# Altium PCB LDO_board.PcbDoc
Units mm, origin at the board's own origin, x right, y up, seen from the top; angles counter-clockwise.
Board outline 37 x 49 mm, 2 copper layers (Top Layer, Bottom Layer); 25 components, 14 nets, 135 pads, 56 vias.
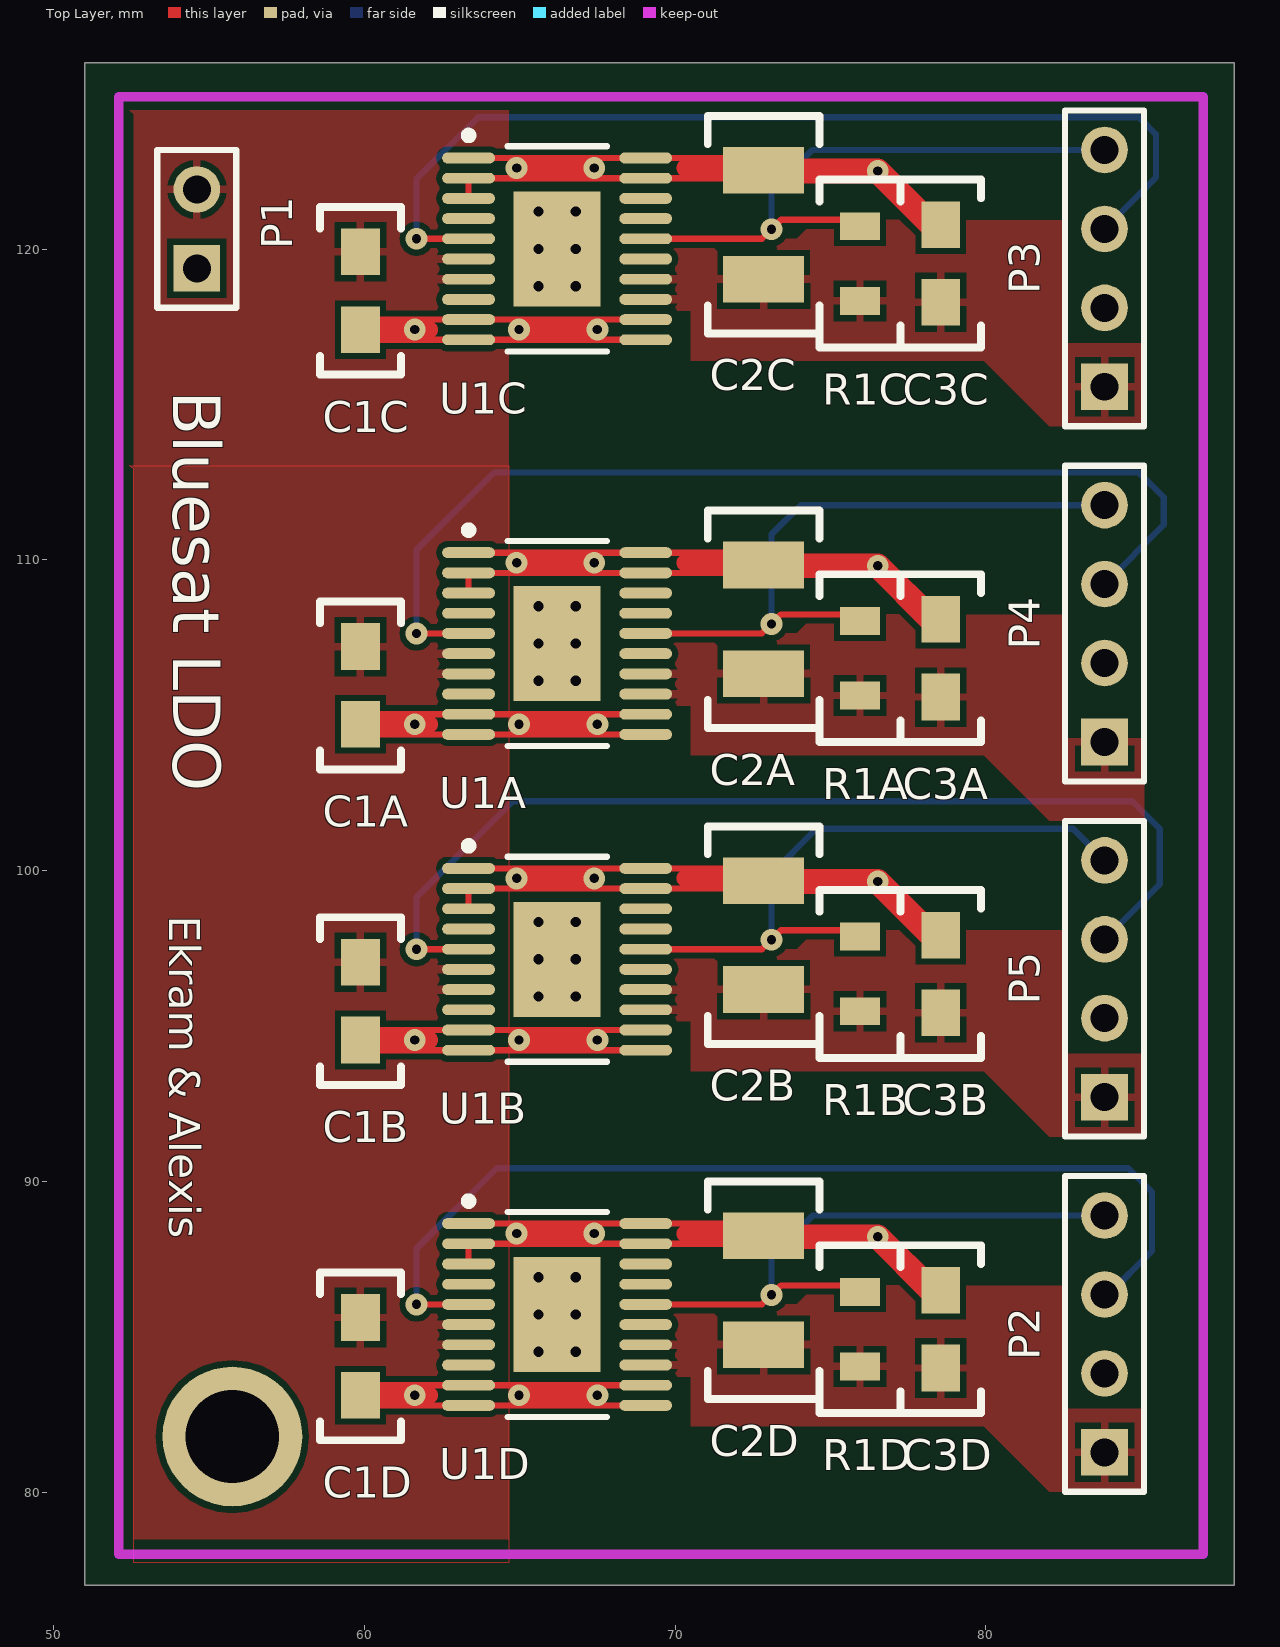
[diagram p0: Top Layer view]
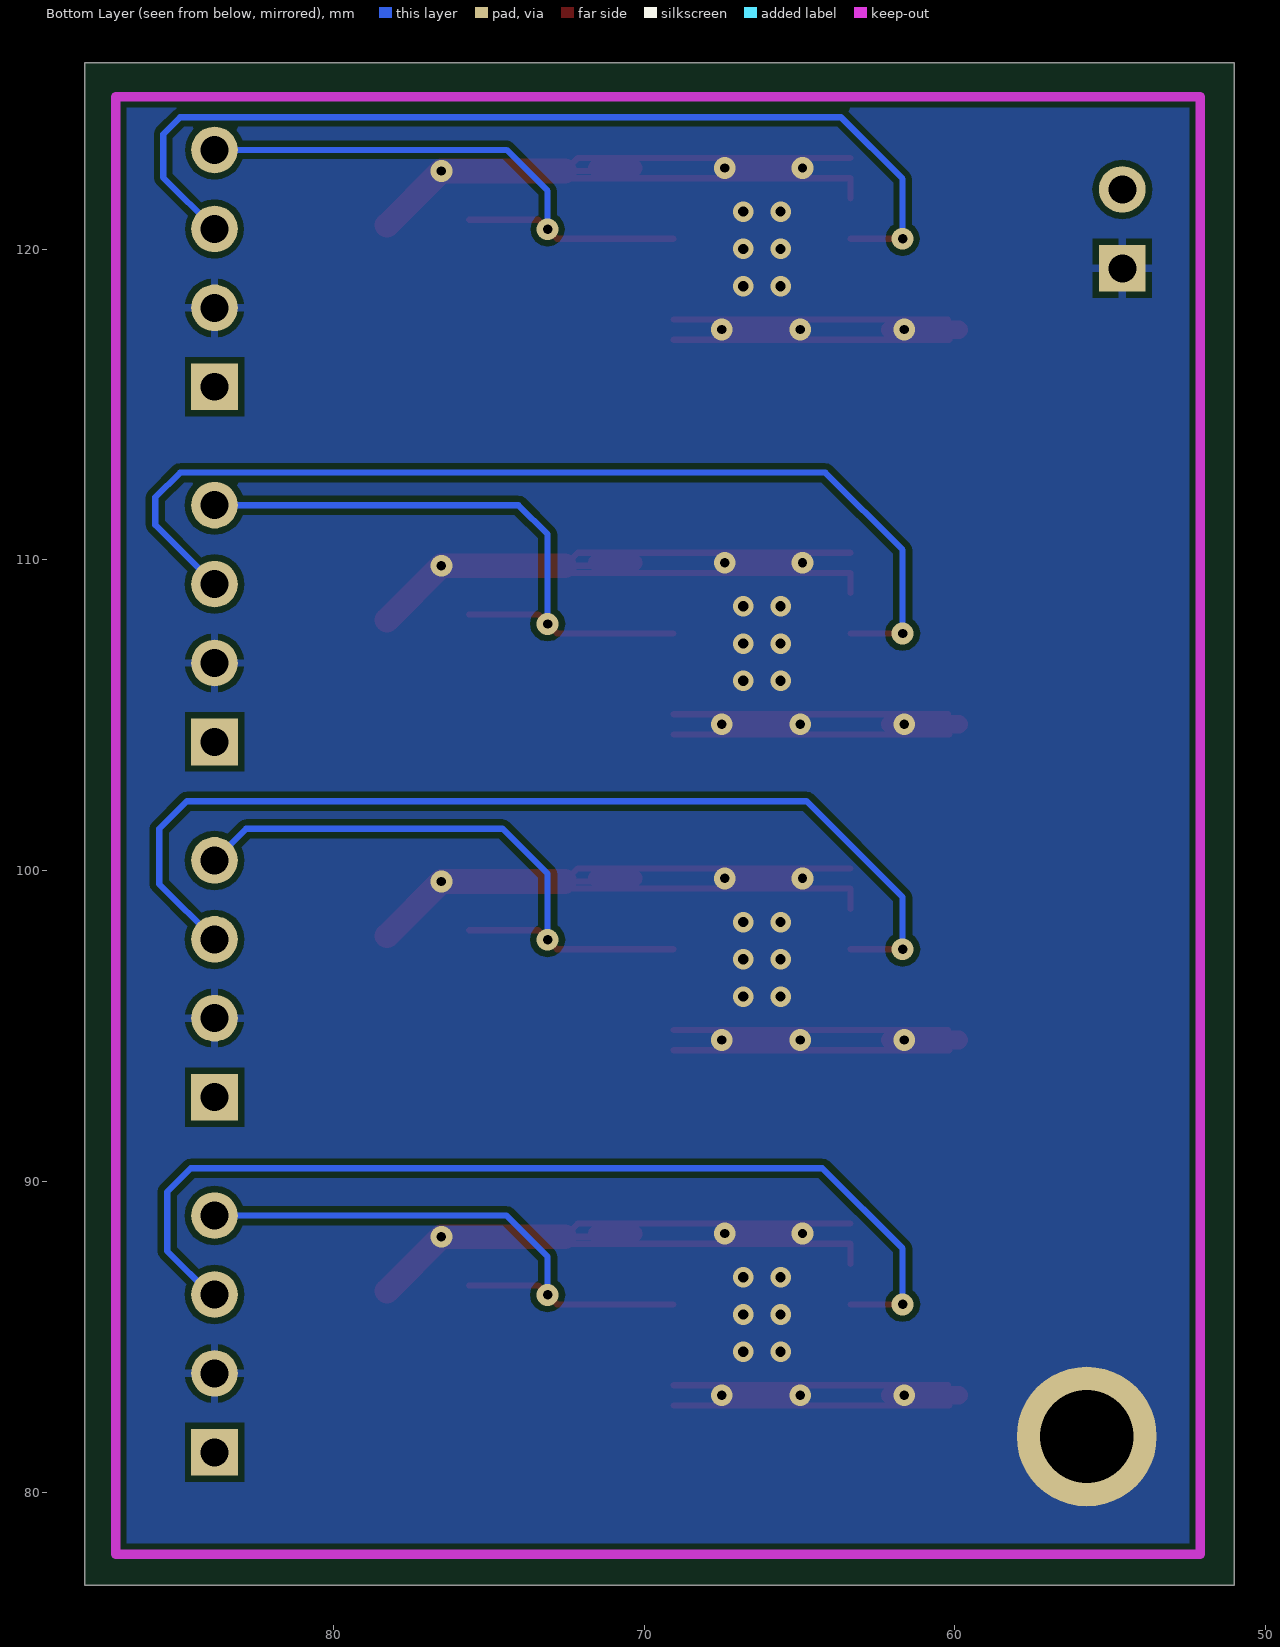
[diagram p1: Bottom Layer view, seen from below]

## Layer stack, top to bottom
Top Layer: signal copper 0.0356
Dielectric: dielectric 0.32, FR-4, Dk 4.8
Bottom Layer: signal copper 0.0356

## Board outline
52,77 88,77 88,126 51,126 51,77

## Design rules (kind name [scope] priority, off if disabled: settings)
Clearance [All] p1: gap=0.2
PlaneConnect PlaneConnect_1 [OnLayer('Bottom Layer')] p1: planeconnectstyle=Direct reliefexpansion=0.508 reliefentries=4 reliefconductorwidth=0.254 reliefairgap=0.254
PlaneConnect [All] p2: planeconnectstyle=Relief reliefexpansion=0.508 reliefentries=4 reliefconductorwidth=0.254 reliefairgap=0.254
PolygonConnect PolygonConnect_2 [All vs (InPadClass('All Pads'))] p1: connectstyle=Relief reliefconductorwidth=0.254 reliefentries=4 polygonreliefangle="90 Angle"
PolygonConnect PolygonConnect_1 [All vs InNet('GND')] p2: connectstyle=Direct reliefconductorwidth=0.254 reliefentries=4 polygonreliefangle="90 Angle"
PolygonConnect [All] p3: connectstyle=Relief reliefconductorwidth=0.254 reliefentries=4 polygonreliefangle="90 Angle"
RoomDefinition LDO13 [InComponentClass('LDO13')] p1: confinementstyle=ConfineIn formatcopy=TRUE lockcomponents=FALSE outline 58.375,115.76 82.55,115.76 82.55,124.46 58.375,124.46
RoomDefinition LDO14 [InComponentClass('LDO14')] p2: confinementstyle=ConfineIn formatcopy=TRUE lockcomponents=FALSE outline 58.375,81.47 82.55,81.47 82.55,90.17 58.375,90.17
RoomDefinition LDO12 [InComponentClass('LDO12')] p3: confinementstyle=ConfineIn formatcopy=TRUE lockcomponents=FALSE outline 58.375,92.9 82.55,92.9 82.55,101.6 58.375,101.6
RoomDefinition LDO11 [InComponentClass('LDO11')] p4: confinementstyle=ConfineIn formatcopy=TRUE lockcomponents=FALSE outline 58.375,103.06 82.55,103.06 82.55,111.76 58.375,111.76
RoutingVias [All] p1: holewidth=0.3 width=0.7 viastyle="Through Hole" minholewidth=0.711 minwidth=1.27 maxholewidth=0.711 maxwidth=1.27
SilkscreenOverComponentPads [All] p1: minsilkscreentomaskgap=0.254
SolderMaskExpansion [All] p1: expansion=0.102
Width [All] p1: maxlimit=1 minlimit=0.2 preferedwidth=0.2
26 further rules are at their usual default settings.

## Classes and differential pairs
component class LDO11: C1A C2A C3A R1A U1A
component class LDO12: C1B C2B C3B R1B U1B
component class LDO13: C1C C2C C3C R1C U1C
component class LDO14: C1D C2D C3D R1D U1D
component class LDO-Board: P1 P2 P3 P4 P5
channel class LDO-BASE: LDO11 LDO12 LDO13 LDO14

## Components (designator, comment, footprint, x,y, rotation, side; value= is the part's Value field where it differs from the comment)
C1A "0805 Cap" "0805 Cap" 59.875,105.96 r270 top (schematic designator C1)
C1B "0805 Cap" "0805 Cap" 59.875,95.8 r270 top (schematic designator C1)
C1C "0805 Cap" "0805 Cap" 59.875,118.66 r270 top (schematic designator C1)
C1D "0805 Cap" "0805 Cap" 59.875,84.37 r270 top (schematic designator C1)
C2A "1210 Cap" "1210 Cap" 72.85,108.085 r90 top (schematic designator C2)
C2B "1210 Cap" "1210 Cap" 72.85,97.925 r90 top (schematic designator C2)
C2C "1210 Cap" "1210 Cap" 72.85,120.785 r90 top (schematic designator C2)
C2D "1210 Cap" "1210 Cap" 72.85,86.495 r90 top (schematic designator C2)
C3A "0805 Cap" "0805 Cap" 78.55,106.835 r90 top (schematic designator C3)
C3B "0805 Cap" "0805 Cap" 78.55,96.675 r90 top (schematic designator C3)
C3C "0805 Cap" "0805 Cap" 78.55,119.535 r90 top (schematic designator C3)
C3D "0805 Cap" "0805 Cap" 78.55,85.245 r90 top (schematic designator C3)
P1 "Header 2" HDR1X2 54.61,119.38 r90 top
P2 "Header 1" HDR1X4 83.82,81.28 r90 top
P3 "Header 2" HDR1X4 83.82,115.57 r90 top
P4 "Header 3" HDR1X4 83.82,104.14 r90 top
P5 "Header 4" HDR1X4 83.82,92.71 r90 top
R1A "0805 Resistor" "0805 Resistor" 75.95,106.835 r270 top (schematic designator R1)
R1B "0805 Resistor" "0805 Resistor" 75.95,96.675 r270 top (schematic designator R1)
R1C "0805 Resistor" "0805 Resistor" 75.95,119.535 r270 top (schematic designator R1)
R1D "0805 Resistor" "0805 Resistor" 75.95,85.245 r270 top (schematic designator R1)
U1A "TPS76700" "SOP-20 TPS76700" 66.205,107.306 r0 top (schematic designator U1)
U1B "TPS76700" "SOP-20 TPS76700" 66.205,97.146 r0 top (schematic designator U1)
U1C "TPS76700" "SOP-20 TPS76700" 66.205,120.006 r0 top (schematic designator U1)
U1D "TPS76700" "SOP-20 TPS76700" 66.205,85.716 r0 top (schematic designator U1)

## Footprints (in the part's own frame and the unit in brackets; to place one, negate y for a bottom-side part, rotate by r counter-clockwise, add the part's x,y. Pads: shape width x height; smd on the part's side, far side on the other; paste and mask are expansions set on the pad)
"0805 Cap" [mm] "0805 Capacitor"
  rect 1.5x1.25 smd: 1(1.25,0) 2(-1.25,0)
  silkscreen extent -2.7,-1.3 2.7,1.3, body extent -1,-0.63 1.1,0.63, height 0.9
"0805 Resistor" [mm] "0805 Resistor"
  rect 0.9x1.3 smd: 1(1.2,0) 2(-1.2,0)
  silkscreen extent -2.7,-1.3 2.7,1.3, body extent -1,-0.63 1.1,0.63, height 0.6
"1210 Cap" [mm] "1210 Capacitor"
  rect 1.5x2.6 smd: 1(1.75,0) 2(-1.75,0)
  silkscreen extent -3.5,-1.8 3.5,1.8, body extent -1.6,-1.1 1.6,1.1, height 1.8
HDR1X2 [mm] "Connector; Header; 2 Position"
  rect 1.5x1.5 hole 0.9: 1(0,0)
  round 1.5 hole 0.9: 2(2.54,0)
  silkscreen extent -1.27,-1.27 3.81,1.27
HDR1X4 [mm] "Connector; Header; 4 Position"
  rect 1.5x1.5 hole 0.9: 1(0,0)
  round 1.5 hole 0.9: 2(2.54,0) 3(5.08,0) 4(7.62,0)
  silkscreen extent -1.27,-1.27 8.89,1.27
"SOP-20 TPS76700" [mm] "TSOP, 20-Leads, Body 6.6x4.5mm (max), Pitch 0.65mm, IPC Medium Density"
  oval 1.7x0.35 smd: 1(-2.85,2.925) 2(-2.85,2.275) 3(-2.85,1.625) 4(-2.85,0.975) 5(-2.85,0.325) 6(-2.85,-0.325) 7(-2.85,-0.975) 8(-2.85,-1.625) 9(-2.85,-2.275) 10(-2.85,-2.925) 11(2.85,-2.925) 12(2.85,-2.275) 13(2.85,-1.625) 14(2.85,-0.975) 15(2.85,-0.325) 16(2.85,0.325) 17(2.85,0.975) 18(2.85,1.625) 19(2.85,2.275) 20(2.85,2.925)
  rect 2.8x3.7 smd: 21(0,0)
  silkscreen extent -2.97,-3.3 1.6,3.77, body extent -2.25,-3.3 2.25,3.3, height 1.2

## Part data
C1A C1B C1C C1D C3A C3B C3C C3D: library part "0805 MLCC - X7R, 10%", "0805 MLCC - X7R, 10%"
C2A C2B C2C C2D: library part "1210 MLCC - X7R, 10%", "1210 MLCC - X7R, 10%"
P1: "Header, 2-Pin"
P2 P3 P4: library part "Header 4", "Header, 4-Pin"
P5: "Header, 4-Pin"
R1A R1B R1C R1D: library part "0805 Thick Film Resistor 1%", "0805 Thick Film Resistor 1%"
U1A U1B U1C U1D: "LDO Regulator - ER"

## Free pads (board coordinates)
  round 4.5 hole 3: 0(55.753,81.788)

## Via types
v1: diameter 0.7, hole 0.3, Top Layer to Bottom Layer, tented both sides, 32 vias
v2: diameter 0.66, hole 0.33, Top Layer to Bottom Layer, tented both sides, 24 vias

## Nets (pads, with @x,y where several pads share a name; then routed paths per layer and width w, separated by ;. In a path a pad name is that pad's centre, name@x,y a point inside that pad or via, vN(x,y) a via of type N, cw(c..) or ccw(c..) an arc to the next point about the centre after c; other vN are vias at no path point)
E\N\_1: P2.3 U1D.5 | length 32.7
  Top Layer w0.2: v1(61.679,86.041) U1D.5
  Bottom Layer w0.2: v1(61.679,86.041) 61.679,87.841 64.262,90.424 84.582,90.424 85.344,89.662 85.344,87.757 83.947,86.36 P2.3 P2.3@83.82,86.233
E\N\_2: P3.3 U1C.5 | length 32.2
  Top Layer w0.2: v1(61.679,120.331) U1C.5
  Bottom Layer w0.2: v1(61.679,120.331) 61.679,122.258 63.661,124.24 84.929,124.24 85.471,123.698 85.471,122.301 P3.3
E\N\_3: P4.3 U1A.5 | length 34
  Top Layer w0.2: v1(61.679,107.631) U1A.5
  Bottom Layer w0.2: v1(61.679,107.631) 61.679,110.32 64.169,112.81 84.929,112.81 85.725,112.014 85.725,111.125 P4.3 P4.3@83.185,109.22
E\N\_4: P5.3 U1B.5 | length 33.2
  Top Layer w0.2: v1(61.679,97.471) U1B.5
  Bottom Layer w0.2: v1(61.679,97.471) 61.679,99.144 64.77,102.235 84.709,102.235 85.598,101.346 85.598,99.568 P5.3
GND: C1A.1 C1B.1 C1C.1 C1D.1 C2A.1 C2B.1 C2C.1 C2D.1 C3A.1 C3B.1 C3C.1 C3D.1 P1.1 P2.2 P3.2 P4.2 P5.2 pad.0 U1A.1 U1A.2 U1A.3 U1A.9 U1A.10 U1A.11 U1A.12 U1A.19 U1A.20 U1A.21 U1B.1 U1B.2 U1B.3 U1B.9 U1B.10 U1B.11 U1B.12 U1B.19 U1B.20 U1B.21 U1C.1 U1C.2 U1C.3 U1C.9 U1C.10 U1C.11 U1C.12 U1C.19 U1C.20 U1C.21 U1D.1 U1D.2 U1D.3 U1D.9 U1D.10 U1D.11 U1D.12 U1D.19 U1D.20 U1D.21 | length 211.7
  Top Layer w0.2: C1D.1@60.179,82.791 U1D.10 U1D.11 ; C1B.1@60.179,94.221 U1B.10 U1B.11 ; C1A.1@60.179,104.381 U1A.10 U1A.11 ; C1C.1@60.179,117.081 U1C.10 U1C.11 ; C1D.1@60.221,83.441 U1D.9 U1D.12 ; C1B.1@60.221,94.871 U1B.9 U1B.12 ; C1A.1@60.221,105.031 U1A.9 U1A.12 ; C1C.1@60.221,117.731 U1C.9 U1C.12 ; U1D.3 U1D.2 U1D.19 72.321,87.991 C2D.1@72.55,88.22 ; U1D.1 U1D.20 72.129,88.641 C2D.1@72.55,88.22 ; U1B.3 U1B.2 U1B.19 72.321,99.421 C2B.1@72.55,99.65 ; U1B.1 U1B.20 72.129,100.071 C2B.1@72.55,99.65 ; U1A.3 U1A.2 U1A.19 72.321,109.581 C2A.1@72.55,109.81 ; U1A.1 U1A.20 72.129,110.231 C2A.1@72.55,109.81 ; U1C.3 U1C.2 U1C.19 72.321,122.281 C2C.1@72.55,122.51 ; U1C.1 U1C.20 72.129,122.931 C2C.1@72.55,122.51 ; 71.5,88.32 71.6,88.22 C2D.1@72.55,88.22 ; 71.5,99.75 71.6,99.65 C2B.1@72.55,99.65 ; 71.5,109.91 71.6,109.81 C2A.1@72.55,109.81 ; 71.5,122.61 71.6,122.51 C2C.1@72.55,122.51
  Top Layer w0.6: C1D.1 62.075,83.12 ; C1B.1 62.075,94.55 ; C1A.1 62.075,104.71 ; C1C.1 62.075,117.41 ; v1(64.9,88.32) v1(67.4,88.32) ; v1(64.9,99.75) v1(67.4,99.75) ; v1(64.9,109.91) v1(67.4,109.91) ; v1(64.9,122.61) v1(67.4,122.61) ; v1(64.975,83.12) v1(67.5,83.12) ; v1(64.975,94.55) v1(67.5,94.55) ; v1(64.975,104.71) v1(67.5,104.71) ; v1(64.975,117.41) v1(67.5,117.41) ; 70.35,88.32 71.5,88.32 ; 70.35,99.75 71.5,99.75 ; 70.35,109.91 71.5,109.91 ; 70.35,122.61 71.5,122.61
  Top Layer w0.8: C2D.1@72.55,88.22 v1(76.52,88.22) C3D.1@78.265,86.475 ; C2B.1@72.55,99.65 v1(76.52,99.65) C3B.1@78.265,97.905 ; C2A.1@72.55,109.81 v1(76.52,109.81) C3A.1@78.265,108.065 ; C2C.1@72.55,122.51 v1(76.52,122.51) C3C.1@78.265,120.765
  other v1: 61.625,83.12 61.625,94.55 61.625,104.71 61.625,117.41
  other v2: 65.605,84.516 66.805,84.516 65.605,85.716 66.805,85.716 65.605,86.916 66.805,86.916 65.605,95.946 66.805,95.946 65.605,97.146 66.805,97.146 65.605,98.346 66.805,98.346 65.605,106.106 66.805,106.106 65.605,107.306 66.805,107.306 65.605,108.506 66.805,108.506 65.605,118.806 66.805,118.806 65.605,120.006 66.805,120.006 65.605,121.206 66.805,121.206
R\E\S\E\T\_1: P2.4 R1D.2 U1D.16 | length 19.3
  Top Layer w0.2: U1D.16 72.796,86.041 v1(73.102,86.347) 73.409,86.654 R1D.2@75.623,86.654
  Bottom Layer w0.2: v1(73.102,86.347) 73.102,87.58 74.422,88.9 P2.4
R\E\S\E\T\_2: P3.4 R1C.2 U1C.16 | length 19.3
  Top Layer w0.2: U1C.16 72.796,120.331 v1(73.102,120.637) 73.409,120.944 R1C.2@75.623,120.944
  Bottom Layer w0.2: v1(73.102,120.637) 73.102,121.87 74.422,123.19 P3.4
R\E\S\E\T\_3: P4.4 R1A.2 U1A.16 | length 20.8
  Top Layer w0.2: U1A.16 72.796,107.631 v1(73.102,107.937) 73.409,108.244 R1A.2@75.623,108.244
  Bottom Layer w0.2: v1(73.102,107.937) 73.102,110.821 74.041,111.76 P4.4
R\E\S\E\T\_4: P5.4 R1B.2 U1B.16 | length 20.7
  Top Layer w0.2: U1B.16 72.796,97.471 v1(73.102,97.777) 73.409,98.084 R1B.2@75.623,98.084
  Bottom Layer w0.2: v1(73.102,97.777) 73.102,99.899 74.549,101.346 82.804,101.346 P5.4
VIN: C1A.2 C1B.2 C1C.2 C1D.2 P1.2 U1A.6 U1A.7 U1B.6 U1B.7 U1C.6 U1C.7 U1D.6 U1D.7
VOUT_1: C2D.2 C3D.2 P2.1 R1D.1 U1D.13 U1D.14
VOUT_2: C2C.2 C3C.2 P3.1 R1C.1 U1C.13 U1C.14
VOUT_3: C2A.2 C3A.2 P4.1 R1A.1 U1A.13 U1A.14
VOUT_4: C2B.2 C3B.2 P5.1 R1B.1 U1B.13 U1B.14
pads on no net: U1A.4 U1A.8 U1A.15 U1A.17 U1A.18 U1B.4 U1B.8 U1B.15 U1B.17 U1B.18 U1C.4 U1C.8 U1C.15 U1C.17 U1C.18 U1D.4 U1D.8 U1D.15 U1D.17 U1D.18

## Polygon pours and split planes (outlines as drawn)
VOUT_2 on Top Layer "Top Layer-No Net" (solid, pour order 15): 69.055,120.331 73.921,120.331 74.534,120.944 75.623,120.944 78.416,120.944 78.425,120.935 80.5,120.935 82.475,120.935 82.475,116.41 70.5,116.41 70.5,118.01 68.7,118.01 68.7,119.435 68.725,119.46
VIN on Top Layer "Top Layer-No Net" (solid, pour order 17): 52.451,124.46 64.643,124.46 64.643,102.616 64.643,89.408 64.643,78.486 52.578,78.486 52.578,96.139 52.578,124.333 52.451,124.46
VOUT_2 on Top Layer "Top Layer-No Net" (solid, pour order 22): 85.09,116.967 82.55,116.967 80.391,116.967 79.883,116.459 82.042,114.3 82.55,114.3 85.09,114.3
VOUT_3 on Top Layer "Top Layer-No Net" (solid, pour order 21): 85.09,104.267 82.55,104.267 80.391,104.267 79.883,103.759 82.042,101.6 82.55,101.6 85.09,101.6
VOUT_3 on Top Layer "Top Layer-No Net" (solid, pour order 14): 69.055,107.631 73.921,107.631 74.534,108.244 75.623,108.244 78.416,108.244 78.425,108.235 80.5,108.235 82.475,108.235 82.475,103.71 70.5,103.71 70.5,105.31 68.7,105.31 68.7,106.735 68.725,106.76
VOUT_4 on Top Layer "Top Layer-No Net" (solid, pour order 13): 69.055,97.471 73.921,97.471 74.534,98.084 75.623,98.084 78.416,98.084 78.425,98.075 80.5,98.075 82.475,98.075 82.475,93.55 70.5,93.55 70.5,95.15 68.7,95.15 68.7,96.575 68.725,96.6
VOUT_4 on Top Layer "Top Layer-No Net" (solid, pour order 20): 85.09,94.107 82.55,94.107 80.391,94.107 79.883,93.599 82.042,91.44 82.55,91.44 85.09,91.44
VOUT_1 on Top Layer "Top Layer-No Net" (solid, pour order 19): 85.09,82.677 82.55,82.677 80.391,82.677 79.883,82.169 82.042,80.01 82.55,80.01 85.09,80.01
VOUT_1 on Top Layer "Top Layer-No Net" (solid, pour order 12): 69.055,86.041 73.921,86.041 74.534,86.654 75.623,86.654 78.416,86.654 78.425,86.645 80.5,86.645 82.475,86.645 82.475,82.12 70.5,82.12 70.5,83.72 68.7,83.72 68.7,85.145 68.725,85.17
GND on Top Layer "Top Layer-No Net" (solid, pour order 16): 52.451,113.03 64.643,113.03 64.643,96.255 64.643,86.112 64.643,77.724 52.578,77.724 52.578,91.281 52.578,112.932 52.451,113.03
GND on Bottom Layer "Top Layer-No Net" (solid, pour order 18): 52.14,124.888 87.04,124.888 87.04,77.988 52.364,77.988 52.14,77.988 52.14,124.888

## Keep-outs
Keep-Out Layer:
  lines w0.3: 52.1,78 87,78 87,124.9 52.1,124.9 52.1,78

## Silkscreen, mask and mechanical layers (free items; w line width, h text height)
Top Overlay:
  text "Bluesat LDO" at 53.848,115.443 h1.52 r270
  text "Ekram & Alexis" at 53.721,98.552 h1 r270
Drill Drawing:
  text ".LEGEND" at 105.88,81.28 h1.52
  text "Drill Drawing." at 105.88,78.74 h1.52

## Dimensions
52.1,78 to 87,78 on Mechanical 1
52.1,78 to 52.1,124.9 on Mechanical 1